# EAGLE board light_controller_v_1_0 (EAGLE 8.4.1)
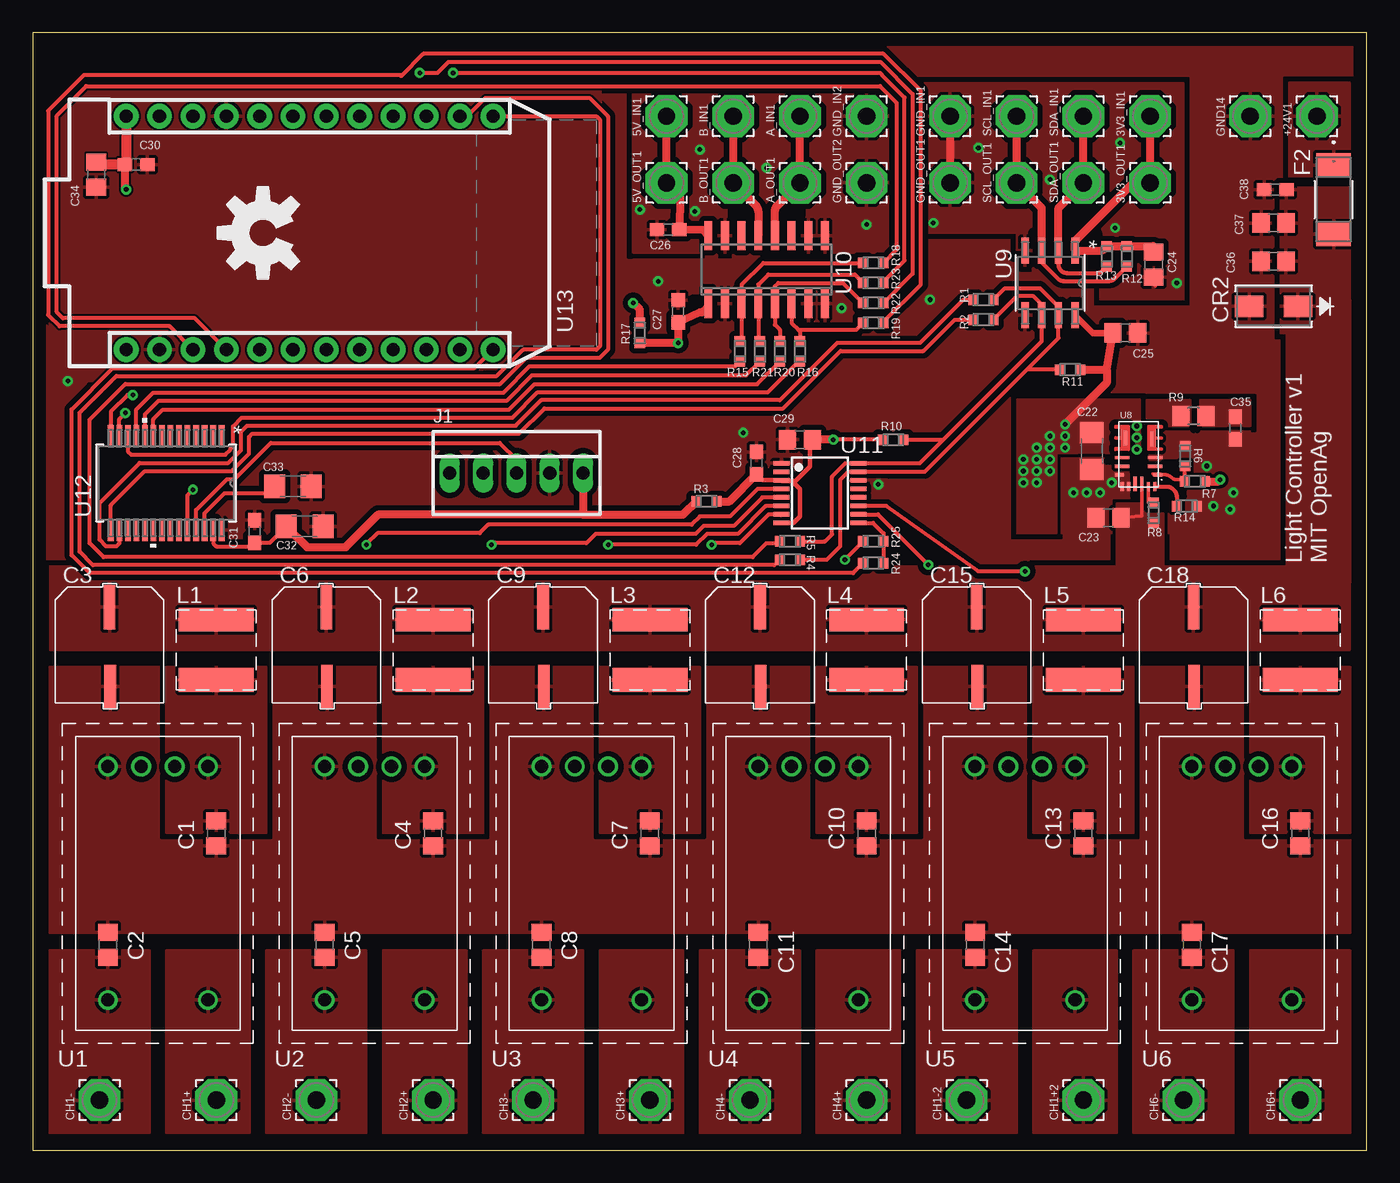
[diagram p0: board, top side]
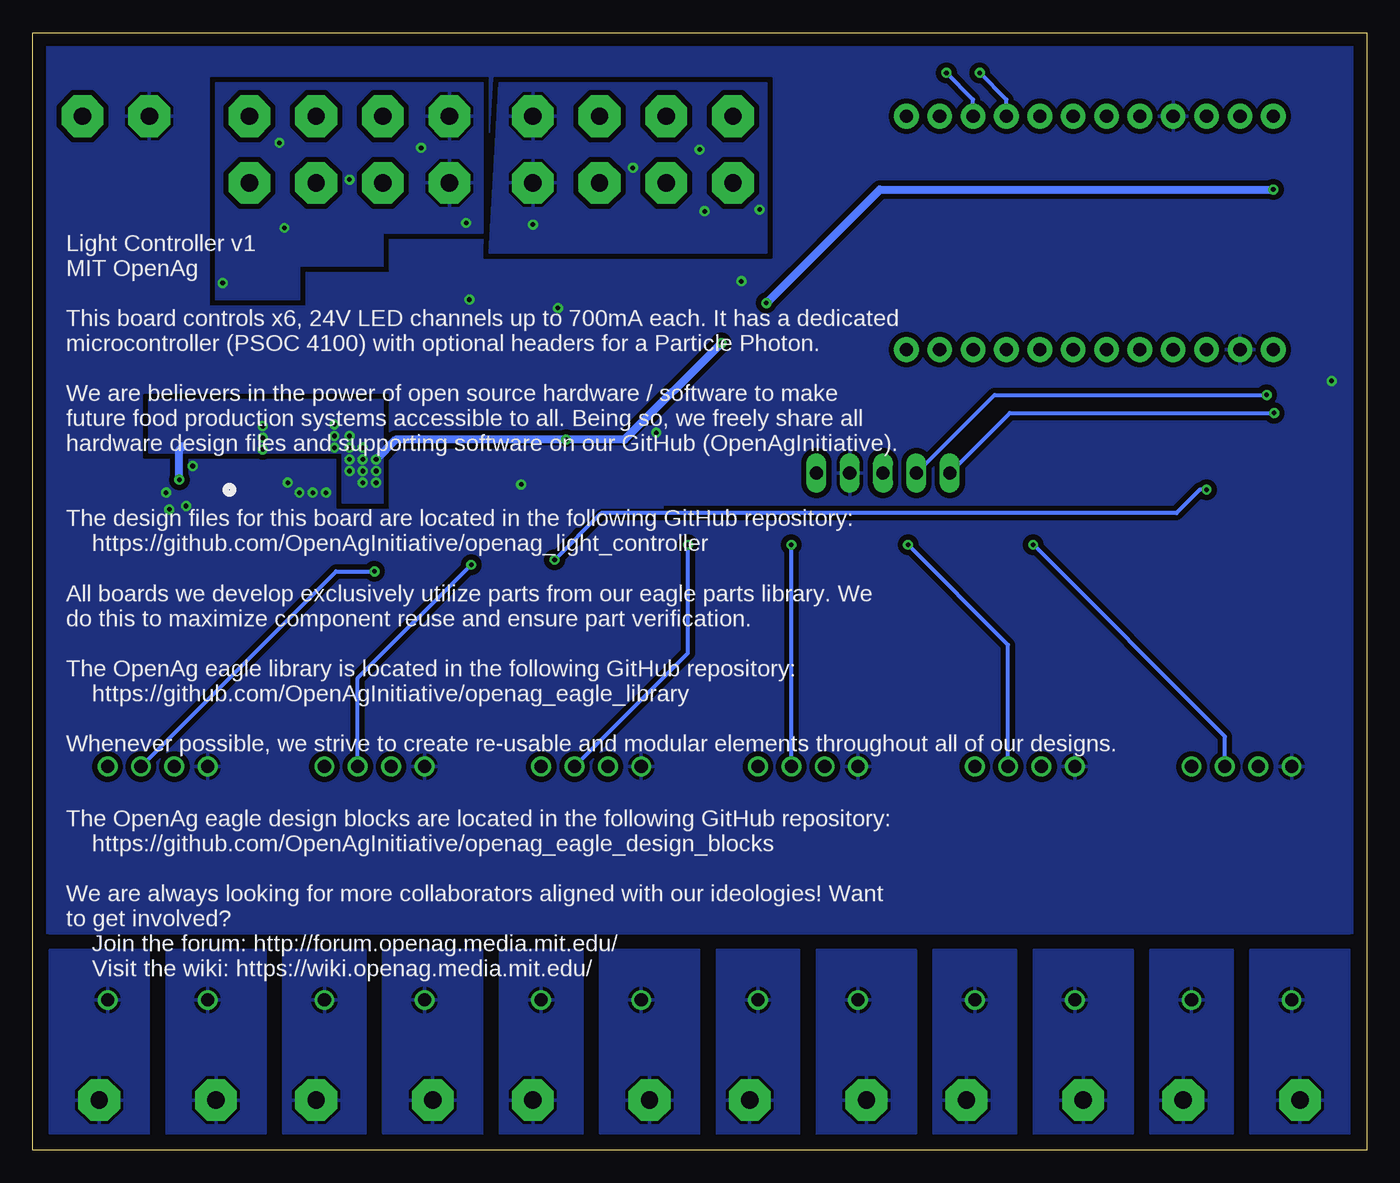
[diagram p1: board, bottom side, seen from below]

Size 101.58 x 85.09 mm. Coordinates in mm from the lower left corner, seen from the top.
Outline: 0,0 101.58,0 101.58,85.09 0,85.09 0,0
Copper layers (1*16): Top 0.035mm / dielectric 1.5mm / Bottom 0.035mm
Design rules "default *": minimum track width 6mil, minimum drill 0.35mm, track to track 6mil, track to pad 6mil, pad to pad 6mil, via to via 6mil, smd to smd 6mil, copper to edge 40mil, drill to drill 6mil, minimum pad ring 10mil, minimum via ring 8mil, stop-mask expansion 4mil, vias tented up to drill 0mil, thermal gap 10mil
tRestrict: 17 lines

## Footprints (pad centres in the part's own frame; a part is rotated, then mirrored left to right if it is on the bottom)
3,17/1,3 = drill 1.321 pad 3.175 octagon: 1 0,0
C0805 = smd 1.3 x 1.5: 1 -0.95,0; 2 0.95,0
EEE-1HA101UP = smd 0.889 x 3.404: + 0,-3.251 | smd 0.889 x 3.251: - -0.051,2.794
C1206 = smd 1.6 x 1.8: 1 -1.4,0; 2 1.4,0
C0603 = smd 1.1 x 1: 1 -0.85,0; 2 0.85,0
SMA = smd 2.18 x 1.63: 1 -1.857,0; 2 1.857,0
SS = smd 1.803 x 2.642: 1 -2.629,0; 2 2.629,0
22-23-2051 = drill 1 long: 1 -5.08,0; 2 -2.54,0; 3 0,0; 4 2.54,0; 5 5.08,0
74404064121 = smd 1.8 x 5.7: 1 -2.3,0; 2 2.3,0
RC0603N = smd 0.756 x 0.8: 1 -0.778,0; 2 0.778,0
R0805 = smd 1.3 x 1.5: 1 -0.95,0; 2 0.95,0
RCD-24-PINNED = drill 1: 1 0,0; 2 0,-2.54; 3 0,-5.08; 4 0,-7.62; 5 17.78,-7.62; 6 17.78,0
20-POWERLFQFN-MODULE = smd 0.675 x 0.25: 1 -1.462,1.55 | smd 1.1 x 0.25: 2 -1.25,0.9; 3 -1.25,0.25; 10 1.25,0.25; 11 1.25,0.9 | smd 0.25 x 1.1: 5 -1.01,-1.2; 8 1,-1.27; 15 0.25,2.25; 16 -0.25,2.25 | smd 0.7 x 0.25: 12 1.45,1.55 | smd 0.25 x 0.7: 13 1.25,2.45; 14 0.75,2.45; 17 -0.75,2.45; 18 -1.25,2.45
D8 = smd 1.981 x 0.559: 1 -2.464,1.905; 2 -2.464,0.635; 3 -2.464,-0.635; 4 -2.464,-1.905; 5 2.464,-1.905; 6 2.464,-0.635; 7 2.464,0.635; 8 2.464,1.905
SOIC16N = smd 0.6 x 2.2: 1 -4.445,-2.6; 2 -3.175,-2.6; 3 -1.905,-2.6; 4 -0.635,-2.6; 5 0.635,-2.6; 6 1.905,-2.6; 7 3.175,-2.6; 8 4.445,-2.6; 9 4.445,2.6; 10 3.175,2.6; 11 1.905,2.6; 12 0.635,2.6; 13 -0.635,2.6; 14 -1.905,2.6; 15 -3.175,2.6; 16 -4.445,2.6
TSSOP16 = smd 0.35 x 1.2: 1 -2.275,-2.925; 2 -1.625,-2.925; 3 -0.975,-2.925; 4 -0.325,-2.925; 5 0.325,-2.925; 6 0.975,-2.925; 7 1.625,-2.925; 8 2.275,-2.925; 9 2.275,2.925; 10 1.625,2.925; 11 0.975,2.925; 12 0.325,2.925; 13 -0.325,2.925; 14 -0.975,2.925; 15 -1.625,2.925; 16 -2.275,2.925
SSOP-28 = smd 1.651 x 0.432: 1 -3.581,4.225; 2 -3.581,3.575; 3 -3.581,2.925; 4 -3.581,2.275; 5 -3.581,1.625; 6 -3.581,0.975; 7 -3.581,0.325; 8 -3.581,-0.325; 9 -3.581,-0.975; 10 -3.581,-1.625; 11 -3.581,-2.275; 12 -3.581,-2.925; 13 -3.581,-3.575; 14 -3.581,-4.225; 15 3.581,-4.225; 16 3.581,-3.575; 17 3.581,-2.925; 18 3.581,-2.275; 19 3.581,-1.625; 20 3.581,-0.975; 21 3.581,-0.325; 22 3.581,0.325; 23 3.581,0.975; 24 3.581,1.625; 25 3.581,2.275; 26 3.581,2.925; 27 3.581,3.575; 28 3.581,4.225
PHOTON = drill 1.016 pad 1.88: 1 1.27,32.258; 2 1.27,29.718; 3 1.27,27.178; 4 1.27,24.638; 5 1.27,22.098; 6 1.27,19.558; 7 1.27,17.018; 8 1.27,14.478; 9 1.27,11.938; 10 1.27,9.398; 11 1.27,6.858; 12 1.27,4.318; 13 19.05,4.318; 14 19.05,6.858; 15 19.05,9.398; 16 19.05,11.938; 17 19.05,14.478; 18 19.05,17.018; 19 19.05,19.558; 20 19.05,22.098; 21 19.05,24.638; 22 19.05,27.178; 23 19.05,29.718; 24 19.05,32.258

## Placement (x,y rotation side)
3V3_IN1  [3,17/1,3]  85.09,78.74 90 top
3V3_OUT1  [3,17/1,3]  85.09,73.66 90 top
5V_IN1  [3,17/1,3]  48.26,78.74 90 top
5V_OUT1  [3,17/1,3]  48.26,73.66 90 top
+24V1  [3,17/1,3]  97.79,78.74 90 top
A_IN1  [3,17/1,3]  58.42,78.74 90 top
A_OUT1  [3,17/1,3]  58.42,73.66 90 top
B_IN1  [3,17/1,3]  53.34,78.74 90 top
B_OUT1  [3,17/1,3]  53.34,73.66 90 top
C1  10uF  [C0805]  13.97,24.13 270 top
C2  10uF  [C0805]  5.71,15.62 90 top
C3  100uF  [EEE-1HA101UP]  5.84,38.1 180 top
C4  10uF  [C0805]  30.48,24.13 270 top
C5  10uF  [C0805]  22.23,15.62 90 top
C6  100uF  [EEE-1HA101UP]  22.35,38.1 180 top
C7  10uF  [C0805]  46.99,24.13 270 top
C8  10uF  [C0805]  38.73,15.62 90 top
C9  100uF  [EEE-1HA101UP]  38.86,38.1 180 top
C10  10uF  [C0805]  63.5,24.13 270 top
C11  10uF  [C0805]  55.24,15.62 90 top
C12  100uF  [EEE-1HA101UP]  55.37,38.1 180 top
C13  10uF  [C0805]  80.01,24.13 270 top
C14  10uF  [C0805]  71.75,15.62 90 top
C15  100uF  [EEE-1HA101UP]  71.88,38.1 180 top
C16  10uF  [C0805]  96.52,24.13 270 top
C17  10uF  [C0805]  88.27,15.62 90 top
C18  100uF  [EEE-1HA101UP]  88.39,38.1 180 top
C22  22uF  [C1206]  80.64,53.24 270 top
C23  10uF  [C0805]  81.92,48.16 180 top
C24  10uF  [C0805]  85.34,67.44 270 top
C25  10uF  [C0805]  83.19,62.23 0 top
C26  0.1uF  [C0603]  48.39,70.1 180 top
C27  0.1uF  [C0603]  49.15,63.88 90 top
C28  0.1uF  [C0603]  55.12,52.32 90 top
C29  4.7uF  [C0805]  58.42,54.1 180 top
C30  0.1uF  [C0603]  7.87,75.06 0 top
C31  0.1uF  [C0603]  16.89,47.12 90 top
C32  1uF  [C1206]  20.7,47.5 0 top
C33  1uF  [C1206]  19.81,50.55 0 top
C34  4.7uF  [C0805]  4.83,74.3 270 top
C35  330pF  [C0603]  91.57,54.99 270 top
C36  10uF  [C0805]  94.49,67.69 180 top
C37  4.7uF  [C0805]  94.49,70.61 180 top
C38  0.1uF  [C0603]  94.61,73.15 180 top
CH1+  [3,17/1,3]  13.97,3.81 90 top
CH1+2  [3,17/1,3]  80.01,3.81 90 top
CH1-  [3,17/1,3]  5.08,3.81 90 top
CH1-2  [3,17/1,3]  71.12,3.81 90 top
CH2+  [3,17/1,3]  30.48,3.81 90 top
CH2-  [3,17/1,3]  21.59,3.81 90 top
CH3+  [3,17/1,3]  46.99,3.81 90 top
CH3-  [3,17/1,3]  38.1,3.81 90 top
CH4+  [3,17/1,3]  63.5,3.81 90 top
CH4-  [3,17/1,3]  54.61,3.81 90 top
CH6+  [3,17/1,3]  96.52,3.81 90 top
CH6-  [3,17/1,3]  87.63,3.81 90 top
CR2  SMAJ26A-13-F  [SMA]  94.49,64.26 180 top
F2  SST 7  [SS]  99.06,72.39 270 top
GND14  [3,17/1,3]  92.71,78.74 90 top
GND_IN1  [3,17/1,3]  69.85,78.74 90 top
GND_IN2  [3,17/1,3]  63.5,78.74 90 top
GND_OUT1  [3,17/1,3]  69.85,73.66 90 top
GND_OUT2  [3,17/1,3]  63.5,73.66 90 top
J1  0022232051  [22-23-2051]  36.83,51.56 0 top
L1  120uH  [74404064121]  13.97,38.1 270 top
L2  120uH  [74404064121]  30.48,38.1 270 top
L3  120uH  [74404064121]  46.99,38.1 270 top
L4  120uH  [74404064121]  63.5,38.1 270 top
L5  120uH  [74404064121]  80.01,38.1 270 top
L6  120uH  [74404064121]  96.52,38.1 270 top
LOGO1  OSHW-LOGOL  [OSHW-LOGO-L]  17.53,69.85 90 top
R1  0 OHM  [RC0603N]  72.39,64.77 0 top
R2  0 OHM  [RC0603N]  72.39,63.25 0 top
R3  0 OHM  [RC0603N]  51.31,49.4 180 top
R4  0 OHM  [RC0603N]  57.66,44.96 0 top
R5  0 OHM  [RC0603N]  57.66,46.35 0 top
R6  51K  [RC0603N]  87.76,52.86 270 top
R7  160K  [RC0603N]  88.49,50.93 0 top
R8  200K  [RC0603N]  85.34,48.54 270 top
R9  6.34 ohm  [R0805]  88.39,55.91 180 top
R10  1K  [RC0603N]  65.53,54.1 180 top
R11  1K  [RC0603N]  78.99,59.44 0 top
R12  1K  [RC0603N]  83.31,68.07 90 top
R13  1K  [RC0603N]  81.79,68.07 90 top
R14  16.5K  [RC0603N]  87.88,49.05 180 top
R15  0 OHM  [RC0603N]  53.85,60.83 90 top
R16  0 OHM  [RC0603N]  58.42,60.83 90 top
R17  0 OHM  [RC0603N]  46.23,62.23 270 top
R18  0 OHM  [RC0603N]  64.01,67.56 180 top
R19  0 OHM  [RC0603N]  64.01,62.99 180 top
R20  0 OHM  [RC0603N]  56.9,60.83 90 top
R21  0 OHM  [RC0603N]  55.37,60.83 90 top
R22  0 OHM  [RC0603N]  64.01,64.52 180 top
R23  0 OHM  [RC0603N]  64.01,66.04 180 top
R24  0 OHM  [RC0603N]  64.01,44.7 0 top
R25  0 OHM  [RC0603N]  64.01,46.35 0 top
SCL_IN1  [3,17/1,3]  74.93,78.74 90 top
SCL_OUT1  [3,17/1,3]  74.93,73.66 90 top
SDA_IN1  [3,17/1,3]  80.01,78.74 90 top
SDA_OUT1  [3,17/1,3]  80.01,73.66 90 top
U1  RCD-24-0.70  [RCD-24-PINNED]  13.34,29.21 270 top
U2  RCD-24-0.70  [RCD-24-PINNED]  29.84,29.21 270 top
U3  RCD-24-0.70  [RCD-24-PINNED]  46.35,29.21 270 top
U4  RCD-24-0.70  [RCD-24-PINNED]  62.87,29.21 270 top
U5  RCD-24-0.70  [RCD-24-PINNED]  79.38,29.21 270 top
U6  RCD-24-0.70  [RCD-24-PINNED]  95.89,29.21 270 top
U8  MPM3620GQV-P  [20-POWERLFQFN-MODULE]  84.2,52.98 180 top
U9  ISO1540DR  [D8]  77.47,66.04 270 top
U10  ADM2481BRWZ-RL7  [SOIC16N]  55.88,67.06 0 top
U11  DAC5578SPW  [TSSOP16]  59.94,50.04 270 top
U12  CY8C4124PVI-432  [SSOP-28]  10.16,50.8 270 top
U13  PHOTONH  [PHOTON]  39.37,59.69 90 top

## Library data of the parts
3V3_IN1 3V3_OUT1 5V_IN1 5V_OUT1 +24V1 A_IN1 A_OUT1 B_IN1 B_OUT1 CH1+ CH1+2 CH1- CH1-2 CH2+ CH2- CH3+ CH3- CH4+ CH4- CH6+ CH6- GND14 GND_IN1 GND_IN2 GND_OUT1 GND_OUT2 SCL_IN1 SCL_OUT1 SDA_IN1 SDA_OUT1 = openag-wirepads
C1-C18 C22-C38 = openag-capacitors; POPULATE: YES; VERIFIED: NO
CR2 = openag-diodes; POPULATE: YES; VERIFIED: NO
F2 = openag-fuses; POPULATE: YES; VERIFIED: NO
J1 = openag-connectors; POPULATE: YES; VERIFIED: NO
L1-L6 = openag-inductors; POPULATE: YES; VERIFIED: NO
LOGO1 = SparkFun-Aesthetics
R1-R7 R9-R25 = openag-resistors; POPULATE: YES; VERIFIED: NO
R8 = openag-resistors; POPULATE: NO; VERIFIED: NO
U1-U6 U8 = openag-regulators; POPULATE: YES; VERIFIED: NO
U9 U10 = openag-isolators; POPULATE: YES; VERIFIED: NO
U11 = openag-dacs; POPULATE: YES; VERIFIED: NO
U12 U13 = openag-microcontrollers; POPULATE: YES; VERIFIED: NO

## Nets
24V_IN: +24V1.1 F2.1
485_5V: 5V_IN1.1 5V_OUT1.1 C26.1 U10.16
485_A: A_IN1.1 A_OUT1.1 U10.12
485_B: B_IN1.1 B_OUT1.1 U10.13
485_GND: C26.2 GND_IN2.1 GND_OUT2.1 U10.9 U10.10 U10.15
+3V3: C22.1 C25.1 C27.1 C28.1 C29.1 R3.1 R7.2 R10.2 R11.2 R17.2 U8.8 U9.8 U10.1 U11.3 U11.8
+24V: C3.+ C6.+ C9.+ C12.+ C15.+ C18.+ C23.1 C36.1 C37.1 C38.1 CR2.1 F2.2 L1.1 L2.1 L3.1 L4.1 L5.1 L6.1 R8.2 U8.16
CH1+: CH1+.1 U1.6
CH1-: C2.1 CH1-.1 U1.5
CH2+: CH2+.1 U2.6
CH2-: C5.1 CH2-.1 U2.5
CH3+: CH3+.1 U3.6
CH3-: C8.1 CH3-.1 U3.5
CH4+: CH4+.1 U4.6
CH4-: C11.1 CH4-.1 U4.5
CH5+: CH1+2.1 U5.6
CH5-: C14.1 CH1-2.1 U5.5
CH6+: CH6+.1 U6.6
CH6-: C17.1 CH6-.1 U6.5
DAC_!CLR!: R24.2 R25.2 U11.9
DIM1: U1.2 U11.4
DIM2: U2.2 U11.5
DIM3: U3.2 U11.6
DIM4: U4.2 U11.7
DIM5: U5.2 U11.10
DIM6: U6.2 U11.11
GND: C1.2 C2.2 C3.- C4.2 C5.2 C6.- C7.2 C8.2 C9.- C10.2 C11.2 C12.- C13.2 C14.2 C15.- C16.2 C17.2 C18.- C22.2 C23.2 C25.2 C27.2 C28.2 C29.2 C30.2 C31.2 C32.2 C33.2 C34.2 C35.2 C36.2 C37.2 C38.2 CR2.2 GND14.1 J1.4 R6.1 R14.1 U1.4 U2.4 U3.4 U4.4 U5.4 U6.4 U8.3 U8.12 U8.13 U8.14 U9.5 U10.2 U10.7 U10.8 U11.1 U11.14 U12.28 U13.2 U13.21
I2C_3V3: 3V3_IN1.1 3V3_OUT1.1 C24.1 R12.2 R13.2 U9.1
I2C_GND: C24.2 GND_IN1.1 GND_OUT1.1 U9.4
I2C_SCL: R12.1 SCL_IN1.1 SCL_OUT1.1 U9.3
I2C_SDA: R13.1 SDA_IN1.1 SDA_OUT1.1 U9.2
N$1: C1.1 L1.2 U1.1
N$2: C4.1 L2.2 U2.1
N$4: C7.1 L3.2 U3.1
N$5: C10.1 L4.2 U4.1
N$6: C13.1 L5.2 U5.1
N$7: C16.1 L6.2 U6.1
N$8: C30.1 C34.1 R17.1 U13.24
N$10: R8.1 U8.17
N$11: R6.2 R7.1 U8.1
N$12: R9.2 U8.5
N$22: C35.1 R9.1
N$23: C33.1 U12.26
N$25: R14.2 U8.18
P0[7]: R25.1 U12.24
P2[6]: R20.1 U12.9
P2[7]: R21.1 U12.10
PHOTON_A0: R24.1 U13.12
PHOTON_D2: R23.1 U13.15
PHOTON_D3: R22.1 U13.16
PHOTON_D4: U13.17
PHOTON_RX: R18.1 U13.4
PHOTON_SCL: R5.1 U13.14
PHOTON_SDA: R4.1 U13.13
PHOTON_TX: R19.1 U13.3
SCB0_I2C_SCL: R2.1 U12.15
SCB0_I2C_SDA: R1.1 U12.16
SCB1_RX[0]: R15.1 U12.11
SCB1_TX[0]: R16.1 U12.12
SCL: R2.2 R5.2 R10.1 U9.6 U11.16
SDA: R1.2 R4.2 R11.1 U9.7 U11.15
SWD_CLK[0]: J1.2 U12.14
SWD_IO[0]: J1.1 U12.13
UART_!RE!: R21.2 R23.2 U10.4
UART_DE: R20.2 R22.2 U10.5
UART_RX: R15.2 R18.2 U10.3
UART_TX: R16.2 R19.2 U10.6
VBAT: U13.22
VDDD: C31.1 C32.1 J1.5 R3.2 U12.27
VIN: U13.1
XRES: J1.3 U12.25

## Tracks (layer width: path | path; a pad name or v marks a point on that pad's centre or on a via)
24V_IN
  pour Top (isolate 0.406): 100.33,81.28 95.63,81.28 95.63,74.17 100.33,74.17
485_5V
  Top 0.61: U10.16 51.03,70.06 C26.1 49.28,72.64 5V_OUT1.1 5V_IN1.1
485_A
  Top 0.61: U10.12 56.52,71.49 arc-45 56.7,71.94 A_OUT1.1 A_IN1.1
485_B
  Top 0.61: U10.13 55.24,71.49 arc45 55.06,71.94 B_OUT1.1 B_IN1.1
485_GND  (via drill 0.35)
  other vias: 63.5,70.48 46.23,71.63 50.8,76.2 55.88,74.8 50.42,71.5
  pour Top (isolate 0.406): 45.72,68.33 45.72,81.28 66.04,81.28 66.04,68.33
  pour Bottom (isolate 0.406): 45.72,68.33 66.8,68.33 66.04,81.28 45.72,81.28
+3V3  (via drill 0.35)
  Top 0.305: R10.2 v60.96,54.1
  Top 0.356: U11.8 57.91,47.75 58.42,48.26 58.42,50.35 57.8,50.97 | 57.8,50.97 57.06,50.97 U11.3 55.58,51.01 C28.1 | 57.8,50.97 58.08,50.97 59.18,52.07 59.18,53.91 C29.1
  Top 0.508: U9.8 80.72,62.23 C25.1
  Top 0.61: U10.1 arc-90 50.77,63.79 C27.1 v49.15,61.47 46.24,61.47 R17.2 | v60.96,54.1 C29.1 | R7.2 90.3,50.93 v90.42,51.05 | R3.1 53.05,49.4 C28.1 | v78.61,55.27 81.78,58.44 81.78,59.44 | 81.78,59.44 C25.1 | R11.2 81.78,59.44
  Bottom 0.61: v49.15,61.47 56.52,54.1 v60.96,54.1 73.94,54.1 v75.44,52.6 | v90.42,51.05 90.42,53.34 90.17,53.59
  other vias: 84.07,54.25 78.61,54.38 78.61,53.49 77.47,53.49 77.47,54.38 77.47,52.6 76.45,52.6 75.44,51.71 76.45,51.71 77.47,51.71 76.45,50.83 76.45,53.49 75.44,50.83 84.07,53.37 84.07,55.14
  pour Top (isolate 0.406, no thermals): 84.33,53.09 84.33,57.15 74.93,57.15 74.93,46.99 77.98,46.99 77.98,53.09
  pour Bottom (isolate 0.406): 74.93,49.28 77.98,49.28 77.98,53.09 92.71,53.09 92.71,57.15 74.93,57.15
+24V
  Top 0.254: U8.16 84.45,48.28 C23.1
  pour Top (isolate 0.406): 17.78,38.1 17.78,44.45 1.27,44.45 1.27,38.1
  pour Top (isolate 0.406): 34.29,38.1 34.29,44.45 17.78,44.45 17.78,38.1
  pour Top (isolate 0.406): 50.8,38.1 50.8,44.45 34.29,44.45 34.29,38.1
  pour Top (isolate 0.406): 67.31,38.1 67.31,44.45 50.8,44.45 50.8,38.1
  pour Top (isolate 0.406): 83.82,38.1 83.82,44.45 67.31,44.45 67.31,38.1
  pour Top (isolate 0.406): 100.33,38.1 100.33,44.45 83.82,44.45 83.82,38.1
  pour Top (isolate 0.406): 95.5,64.77 100.33,64.77 100.33,43.18 95.5,43.18
  pour Top (isolate 0.406, no thermals): 86.11,46.99 82.55,46.99 82.55,49.28 84.33,49.28 85.09,48.51 86.11,48.51
  pour Top (isolate 0.406): 100.33,62.23 100.33,73.28 95,73.28 95,62.23
  pour Top (isolate 0.406): 82.55,48.26 86.11,48.26 86.11,43.18 82.55,43.18
CH1+
  pour Bottom (isolate 0.406): 10.16,1.27 10.16,15.24 16.51,15.24 16.51,1.27
  pour Top (isolate 0.406): 10.16,1.27 10.16,15.24 16.51,15.24 16.51,1.27
CH1-
  pour Top (isolate 0.406): 1.27,1.27 1.27,15.24 8.89,15.24 8.89,1.27
  pour Bottom (isolate 0.406): 1.27,1.27 1.27,15.24 8.89,15.24 8.89,1.27
CH2+
  pour Bottom (isolate 0.406): 26.67,1.27 26.67,15.24 33.02,15.24 33.02,1.27
  pour Top (isolate 0.406): 26.67,1.27 26.67,15.24 33.02,15.24 33.02,1.27
CH2-
  pour Top (isolate 0.406): 17.78,1.27 17.78,15.24 25.4,15.24 25.4,1.27
  pour Bottom (isolate 0.406): 17.78,1.27 17.78,15.24 25.4,15.24 25.4,1.27
CH3+
  pour Bottom (isolate 0.406): 43.18,1.27 43.18,15.24 49.53,15.24 49.53,1.27
  pour Top (isolate 0.406): 43.18,1.27 43.18,15.24 49.53,15.24 49.53,1.27
CH3-
  pour Top (isolate 0.406): 34.29,1.27 34.29,15.24 41.91,15.24 41.91,1.27
  pour Bottom (isolate 0.406): 34.29,1.27 34.29,15.24 41.91,15.24 41.91,1.27
CH4+
  pour Bottom (isolate 0.406): 59.69,1.27 59.69,15.24 66.04,15.24 66.04,1.27
  pour Top (isolate 0.406): 59.69,1.27 59.69,15.24 66.04,15.24 66.04,1.27
CH4-
  pour Top (isolate 0.406): 50.8,1.27 50.8,15.24 58.42,15.24 58.42,1.27
  pour Bottom (isolate 0.406): 50.8,1.27 50.8,15.24 58.42,15.24 58.42,1.27
CH5+
  pour Bottom (isolate 0.406): 76.2,1.27 76.2,15.24 82.55,15.24 82.55,1.27
  pour Top (isolate 0.406): 76.2,1.27 76.2,15.24 82.55,15.24 82.55,1.27
CH5-
  pour Top (isolate 0.406): 67.31,1.27 67.31,15.24 74.93,15.24 74.93,1.27
  pour Bottom (isolate 0.406): 67.31,1.27 67.31,15.24 74.93,15.24 74.93,1.27
CH6+
  pour Bottom (isolate 0.406): 92.71,1.27 92.71,15.24 100.33,15.24 100.33,1.27
  pour Top (isolate 0.406): 92.71,1.27 92.71,15.24 100.33,15.24 100.33,1.27
CH6-
  pour Top (isolate 0.406): 83.82,1.27 83.82,15.24 91.44,15.24 91.44,1.27
  pour Bottom (isolate 0.406): 83.82,1.27 83.82,15.24 91.44,15.24 91.44,1.27
DAC_!CLR!
  Top 0.305: U11.9 64,47.76 64.79,46.97 R25.2 R24.2
  Top 0.356: 63.25,47.76 U11.9
DIM1  (via drill 0.35)
  Top 0.305: U11.4 55.19,50.36 53.09,48.26 50.8,48.26 50.16,47.62 34.67,47.62 34.04,46.99 26.25,46.99 25.4,46.14 v25.4,46.1
  Bottom 0.305: U1.2 10.79,31.5 v25.4,46.1
DIM2  (via drill 0.35)
  Top 0.305: 57,49.7 U11.5 55.55,49.71 53.39,47.55 51.09,47.55 50.48,46.94 42.87,46.94 42.16,46.23 35.05,46.23 v34.92,46.1
  Bottom 0.305: U2.2 27.3,38.48 v34.92,46.1
DIM3  (via drill 0.35)
  Top 0.305: U11.6 57,49.05 55.81,49.05 53.69,46.94 51.34,46.94 50.51,46.1 v43.81,46.1
  Bottom 0.305: U3.2 v43.81,46.1
DIM4  (via drill 0.35)
  Top 0.305: U11.7 56.03,48.41 53.85,46.23 51.82,46.23 v51.69,46.1
  Top 0.356: 56.98,48.37 U11.7
  Bottom 0.305: U4.2 51.69,37.85 v51.69,46.1
DIM5  (via drill 0.35)
  Top 0.305: U11.10 64.36,48.41 v68.2,44.58
  Bottom 0.305: U5.2 76.83,35.94 v68.2,44.58
DIM6  (via drill 0.35)
  Top 0.305: U11.11 64.98,49.06 72.01,44.07 v75.56,44.07
  Bottom 0.305: U6.2 78.49,44.07 v75.56,44.07
GND  (via drill 0.35)
  other vias: 68.33,64.77 47.62,66.17 82.17,50.83 81.28,50.06 80.26,50.06 79.25,50.06 91.44,50.06 89.92,49.05 91.19,48.79 89.41,52.1 61.59,64.14 64.39,50.7 54.1,54.64 2.67,58.57
  pour Bottom (isolate 0.406): 17.78,16.51 1.27,16.51 1.27,36.83 17.78,36.83
  pour Top (isolate 0.406, rank 2): 1.27,16.51 1.27,36.83 17.78,36.83 17.78,16.51
  pour Bottom (isolate 0.406): 34.29,16.51 17.78,16.51 17.78,36.83 34.29,36.83
  pour Top (isolate 0.406, rank 2): 17.78,16.51 17.78,36.83 34.29,36.83 34.29,16.51
  pour Bottom (isolate 0.406): 50.8,16.51 34.29,16.51 34.29,36.83 50.8,36.83
  pour Top (isolate 0.406, rank 2): 34.29,16.51 34.29,36.83 50.8,36.83 50.8,16.51
  pour Bottom (isolate 0.406): 67.31,16.51 50.8,16.51 50.8,36.83 67.31,36.83
  pour Top (isolate 0.406, rank 2): 50.8,16.51 50.8,36.83 67.31,36.83 67.31,16.51
  pour Bottom (isolate 0.406): 83.82,16.51 67.31,16.51 67.31,36.83 83.82,36.83
  pour Top (isolate 0.406, rank 2): 67.31,16.51 67.31,36.83 83.82,36.83 83.82,16.51
  pour Bottom (isolate 0.406): 100.33,16.51 83.82,16.51 83.82,36.83 100.33,36.83
  pour Top (isolate 0.406, rank 2): 83.82,16.51 83.82,36.83 100.33,36.83 100.33,16.51
  pour Top (isolate 0.406, rank 3): 0,38.1 101.6,38.1 101.6,85.09 0,85.09
  pour Bottom (isolate 0.406, rank 3): 0,16.51 101.6,16.51 101.6,85.09 0,85.09
  pour Top (isolate 0.406): 67.31,69.09 74.17,69.09 74.17,66.55 80.52,66.55 80.52,62.23 67.31,62.23
  pour Bottom (isolate 0.406): 67.31,69.09 74.17,69.09 74.17,66.55 80.52,66.55 80.52,62.23 67.31,62.23
  pour Top (isolate 0.406): 45.72,62.23 66.04,62.23 66.04,67.82 45.72,67.82
  pour Bottom (isolate 0.406): 66.04,67.82 45.72,67.82 45.72,62.23 66.04,62.23
  pour Top (isolate 0.356): 53.59,55.12 65.02,55.12 65.02,47.5 53.59,47.5
  pour Top (isolate 0.406): 22.86,45.72 22.86,57.15 5.08,57.15 5.08,45.72
  pour Top: 1.27,81.28 43.18,81.28 44.45,59.69 1.27,58.42
  pour Bottom (isolate 0.406): 1.27,58.42 1.27,81.28 43.18,81.28 44.45,59.69
  pour Bottom: 53.59,55.12 65.02,55.12 65.02,47.5 53.59,47.5
  pour Top (isolate 0.254, rank 2, no thermals): 92.71,57.15 74.93,57.15 74.93,46.99 92.71,46.99
  pour Bottom (isolate 0.406, rank 2): 74.93,46.99 92.71,46.99 92.71,52.58 78.49,52.58 78.49,48.77 74.93,48.77
  pour Top (isolate 0.406): 88.9,81.28 88.9,62.23 93.98,62.23 93.98,81.28
  pour Bottom (isolate 0.406): 88.9,81.28 88.9,62.23 100.33,62.23 100.33,81.28
I2C_3V3
  Top 0.61: 3V3_IN1.1 3V3_OUT1.1 83.82,73.66 79.38,69.22 U9.1 | 79.54,68.34 U9.1 | U9.1 81.44,68.5 R13.2 R12.2 85.33,68.85 C24.1
I2C_GND  (via drill 0.35)
  Top 0.254: C24.2 85.47,65.79
  Top 0.61: GND_IN1.1 GND_OUT1.1
  other vias: 87.12,66.04 77.47,73.91 82.8,76.71 72.01,76.33 82.42,70.23 68.58,70.61
  pour Top (isolate 0.406): 67.31,69.85 67.31,81.28 87.63,81.28 87.63,64.77 81.28,64.77 81.28,67.31 74.93,67.31 74.93,69.85
  pour Bottom (isolate 0.406): 81.28,64.77 87.63,64.77 87.63,81.28 67.31,81.28 67.31,69.85 74.93,69.85 74.93,67.31 81.28,67.31
I2C_SCL
  Top 0.305: U9.3 76.83,67.59 78.05,66.38 arc45 78.5,66.19 81.95,66.19 arc45 82.4,66.38 R12.1
  Top 0.61: SCL_IN1.1 SCL_OUT1.1 76.83,71.75 U9.3
I2C_SDA
  Top 0.305: U9.2 78.11,67.45 arc45 78.29,67 78.3,66.99 arc45 78.75,66.8 81.03,66.8 arc45 81.48,66.99 R13.1
  Top 0.61: SDA_IN1.1 SDA_OUT1.1 78.11,71.75 U9.2
N$1
  pour Top (isolate 0.406): 10.16,24.13 10.16,36.83 17.78,36.83 17.78,24.13
N$2
  pour Top (isolate 0.406): 26.67,24.13 26.67,36.83 34.29,36.83 34.29,24.13
N$4
  pour Top (isolate 0.406): 43.18,24.13 43.18,36.83 50.8,36.83 50.8,24.13
N$5
  pour Top (isolate 0.406): 59.69,24.13 59.69,36.83 67.31,36.83 67.31,24.13
N$6
  pour Top (isolate 0.406): 76.2,24.13 76.2,36.83 83.82,36.83 83.82,24.13
N$7
  pour Top (isolate 0.406): 92.71,24.13 92.71,36.83 100.33,36.83 100.33,24.13
N$8  (via drill 0.35)
  Top 0.406: C34.1 5.01,75.06 | 7.11,75.14 C30.1
  Top 0.61: R17.1 46.23,64.01 v45.72,64.52 | v7.11,73.15 7.02,73.24 C30.1
  Top 0.762: C30.1 5.01,75.06 | U13.24 7.11,75.14
  Bottom 0.61: v45.72,64.52 37.08,73.15 v7.11,73.15
N$10
  Top 0.254: U8.17 84.95,49.32 R8.1
N$11
  Top 0.254: U8.1 86.22,51.43 arc-45 86.67,51.25 86.68,51.24 arc45 87.13,51.05 87.72,51.05
  Top 0.305: R6.2 87.72,51.91 87.72,51.05 R7.1
N$12
  pour Top (isolate 0.406, no thermals): 84.84,57.15 88.14,57.15 88.14,55.12 86.11,55.12 86.11,53.34 84.84,53.34
N$22
  Top 0.762: R9.1 89.34,55.84
  pour Top (isolate 0.406, no thermals): 88.9,55.12 88.9,57.15 92.71,57.15 92.71,55.12
N$23
  Top 0.305: U12.26 13.08,48.51 14.61,50.04 18.54,50.04 18.41,50.17 C33.1
N$25
  Top 0.305: U8.18 86.36,50.53 arc-45 86.81,50.35 86.94,50.22 arc-45 87.12,49.77 87.12,49.06 R14.2
P0[7]  (via drill 0.35)
  Top 0.305: R25.1 61.85,44.97 v61.85,44.96 | U12.24 11.79,49.88 v12.19,50.29
  Bottom 0.305: v61.85,44.96 58.29,48.51 14.48,48.51 12.7,50.29 v12.19,50.29
P2[6]
  Top 0.305: R20.1 55.16,58.32 38.2,58.32 36.27,56.39 9.91,56.39 9.19,55.67 U12.9
P2[7]
  Top 0.305: R21.1 54.32,59.01 38.02,59.01 36.07,57.05 9.55,57.05 8.54,56.03 U12.10
PHOTON_A0
  Top 0.305: U13.12 33.66,59.56 6.1,59.56 2.95,56.41 2.95,45.31 4.32,43.94 62.47,43.94 R24.1
PHOTON_D2  (via drill 0.35)
  Top 0.305: R23.1 64.79,66.14 66.4,67.75 66.4,80.16 64.64,81.92 64.52,82.04 v32,82.04
  Bottom 0.305: U13.15 29.97,80.01 v32,82.04
PHOTON_D3  (via drill 0.35)
  Top 0.305: v29.46,82.04 30.82,82.04 31.66,82.88 64.54,82.88 67,80.42 67,66.73 R22.1
  Bottom 0.305: U13.16 27.43,80.01 v29.46,82.04
PHOTON_RX
  Top 0.305: U13.4 12.34,63.35 2.29,63.35 1.83,63.8 1.83,78.79 4.06,81.03 64.52,81.03 65.79,79.76 65.79,68.56 R18.1
PHOTON_SCL
  Top 0.305: R5.1 56.75,46.23 55.88,46.23 54.81,45.16 5.38,45.16 4.32,46.23 4.32,55.63 7.04,58.34 35.58,58.34 35.74,58.5 | U13.14 33.08,78.74 34.47,80.14 42.39,80.14 43.79,78.74 43.79,60.96 43.18,60.35 37.59,60.35 | 37.59,60.35 | 35.74,58.5 37.59,60.35 | 35.74,58.5 35.59,58.34
PHOTON_SDA
  Top 0.305: R4.1 56.47,44.55 4.57,44.55 | U13.13 42.93,78.74 43.18,78.49 43.18,61.21 42.93,60.96 37.34,60.96 35.33,58.95 6.35,58.95 3.56,56.16 3.56,45.57 4.57,44.55 | 4.57,44.55
PHOTON_TX
  Top 0.305: U13.3 10.41,62.74 2.03,62.74 1.17,63.6 1.17,79.15 3.89,81.87 28.11,81.87 | R19.1 64.79,63.09 67.61,65.92 67.61,80.67 64.8,83.49 29.73,83.49 28.11,81.87 | 28.03,81.79 28.11,81.87
SCB0_I2C_SCL
  Top 0.305: U12.15 5.93,49.12 8.53,51.71 15.13,51.71 16.46,53.04 16.46,54.3 16.71,54.56 37.03,54.56 38.96,56.49 57.14,56.49 61.51,60.86 67.82,60.86 70.2,63.25 R2.1
SCB0_I2C_SDA
  Top 0.305: R1.1 70.87,64.77 67.56,61.47 61.26,61.47 56.89,57.1 38.7,57.1 36.77,55.17 16.31,55.17 15.85,54.71 15.85,53.3 14.88,52.32 8.13,52.32 5.08,49.28 5.08,46.48 5.59,45.97 6.35,45.97 6.58,46.21 U12.16
SCB1_RX[0]
  Top 0.305: R15.1 53.48,59.69 37.85,59.69 35.81,57.66 9.8,57.66 | U12.11 7.88,56.4 9.14,57.66 9.3,57.66 | 9.8,57.66 | 9.8,57.66 9.3,57.66 | 9.3,57.66
SCB1_TX[0]
  Top 0.305: U12.12 7.24,53.22 7.49,52.96 14.65,52.96 15.06,53.37 15.06,53.41 15.24,53.59 15.24,55.12 15.9,55.78 36.52,55.78 38.45,57.71 55.98,57.71 58.32,60.05 R16.1
SCL
  Top 0.305: R5.2 60.33,46.35 60.86,46.89 60.86,51.29 61.88,52.31 U11.16 67.55,52.31 69.34,54.1 | R2.2 73.17,63.26 74.93,65.02 76.2,65.02 76.83,64.39 U9.6 76.83,61.59 69.34,54.1 | R10.1 69.34,54.1
SDA
  Top 0.305: R4.2 60.45,44.96 61.47,45.97 61.47,51.03 62.08,51.65 62.85,51.65 U11.15 67.92,51.66 75.69,59.44 | R1.2 74.03,65.63 76.69,65.63 78.11,64.22 U9.7 78.11,61.85 75.69,59.44 | R11.1 75.69,59.44
SWD_CLK[0]  (via drill 0.35)
  Top 0.305: U12.14 5.93,56.23 7.22,57.51 v7.62,57.51
  Bottom 0.305: J1.2 28.34,57.51 v7.62,57.51
SWD_IO[0]  (via drill 0.35)
  Top 0.305: U12.13 6.58,55.67 v7.05,56.13
  Bottom 0.305: J1.1 27.18,56.13 v7.05,56.13
UART_!RE!
  Top 0.305: R23.2 62.59,66.67 56.01,66.67 55.24,65.91 U10.4 55.24,61.74 | 55.24,61.74 R21.2 55.24,61.74
UART_DE
  Top 0.305: R22.2 61.71,66.04 56.77,66.04 56.52,65.79 U10.5 56.52,62.87 56.9,62.48 R20.2
UART_RX
  Top 0.305: R18.2 55.63,67.56 53.98,65.91 U10.3 53.98,61.74 R15.2
UART_TX
  Top 0.305: U10.6 57.78,62.99 58.29,62.48 | 58.29,62.48 58.42,62.36 R16.2 | R19.2 62.72,62.48 58.29,62.48
VDDD
  Top 0.305: U12.27 13.73,46.21 13.97,45.97 16.85,45.97 C31.1 18.07,46.27 C32.1
  Top 0.61: 41.91,48.39 26.29,48.39 23.82,45.92 20.88,45.92 C32.1 | 41.91,48.39 49.51,48.39 R3.2 | J1.5 41.91,48.39
XRES
  Top 0.305: J1.3 36.83,52.58 35.56,53.85 18.13,53.85 15.38,51.1 14.78,51.1 12.44,48.76 U12.25

## Text on the board
tPlace: Light Controller v1 / MIT OpenAg
bPlace: Light Controller v1 / MIT OpenAg / / This board controls x6, 24V LED channels up to 700mA each. It has a dedicated / microcontroller (PSOC 4100) with optional headers for a Particle Photon. / / We are believers in the power of open source hardware / software to make / future food production systems accessible to all. Being so, we freely share all / hardware design files and supporting software on our GitHub (OpenAgInitiative). / / / The design files for this board are located in the following GitHub repository: / https://github.com/OpenAgInitiative/openag_light_controller / / All boards we develop exclusively utilize parts from our eagle parts library. We / do this to maximize component reuse and ensure part verification. / / The OpenAg eagle library is located in the following GitHub repository: / https://github.com/OpenAgInitiative/openag_eagle_library / / Whenever possible, we strive to create re-usable and modular elements throughout all of our designs. / / / The OpenAg eagle design blocks are located in the following GitHub repository: / https://github.com/OpenAgInitiative/openag_eagle_design_blocks / / We are always looking for more collaborators aligned with our ideologies! Want / to get involved? / Join the forum: http://forum.openag.media.mit.edu/ / Visit the wiki: https://wiki.openag.media.mit.edu/